# Altium PCB Midas.PcbDoc
Units mm, origin at the board's own origin, x right, y up, seen from the top; angles counter-clockwise.
Board outline 95 x 95 mm, 2 copper layers (Top Layer, Bottom Layer); 8 components, 9 nets, 58 pads, 1 vias.
Unrouted connection lines stored in the file: 2.
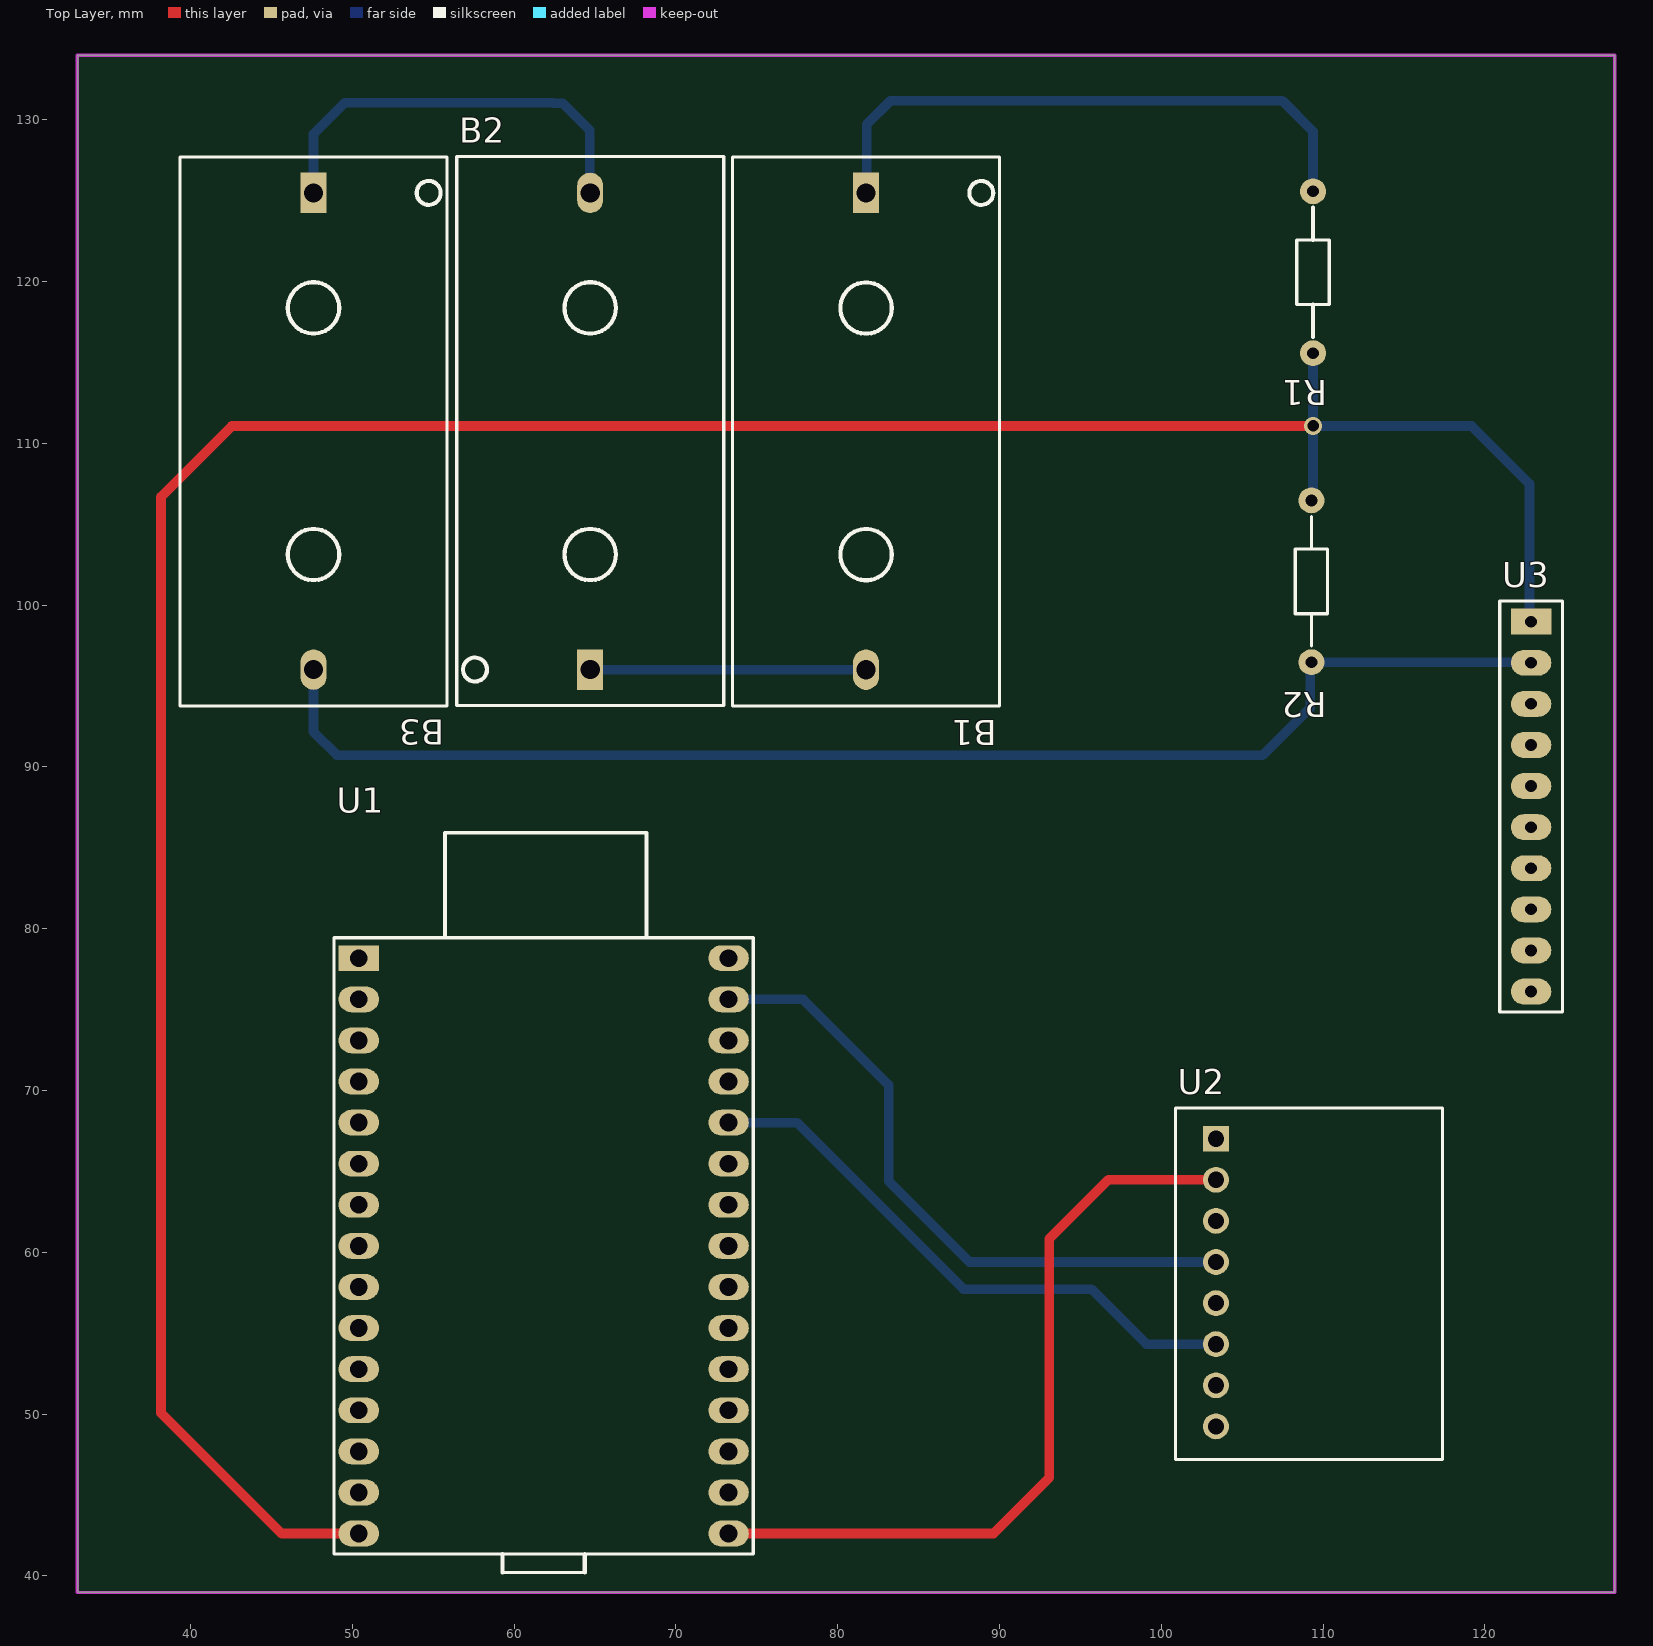
[diagram p0: Top Layer view]
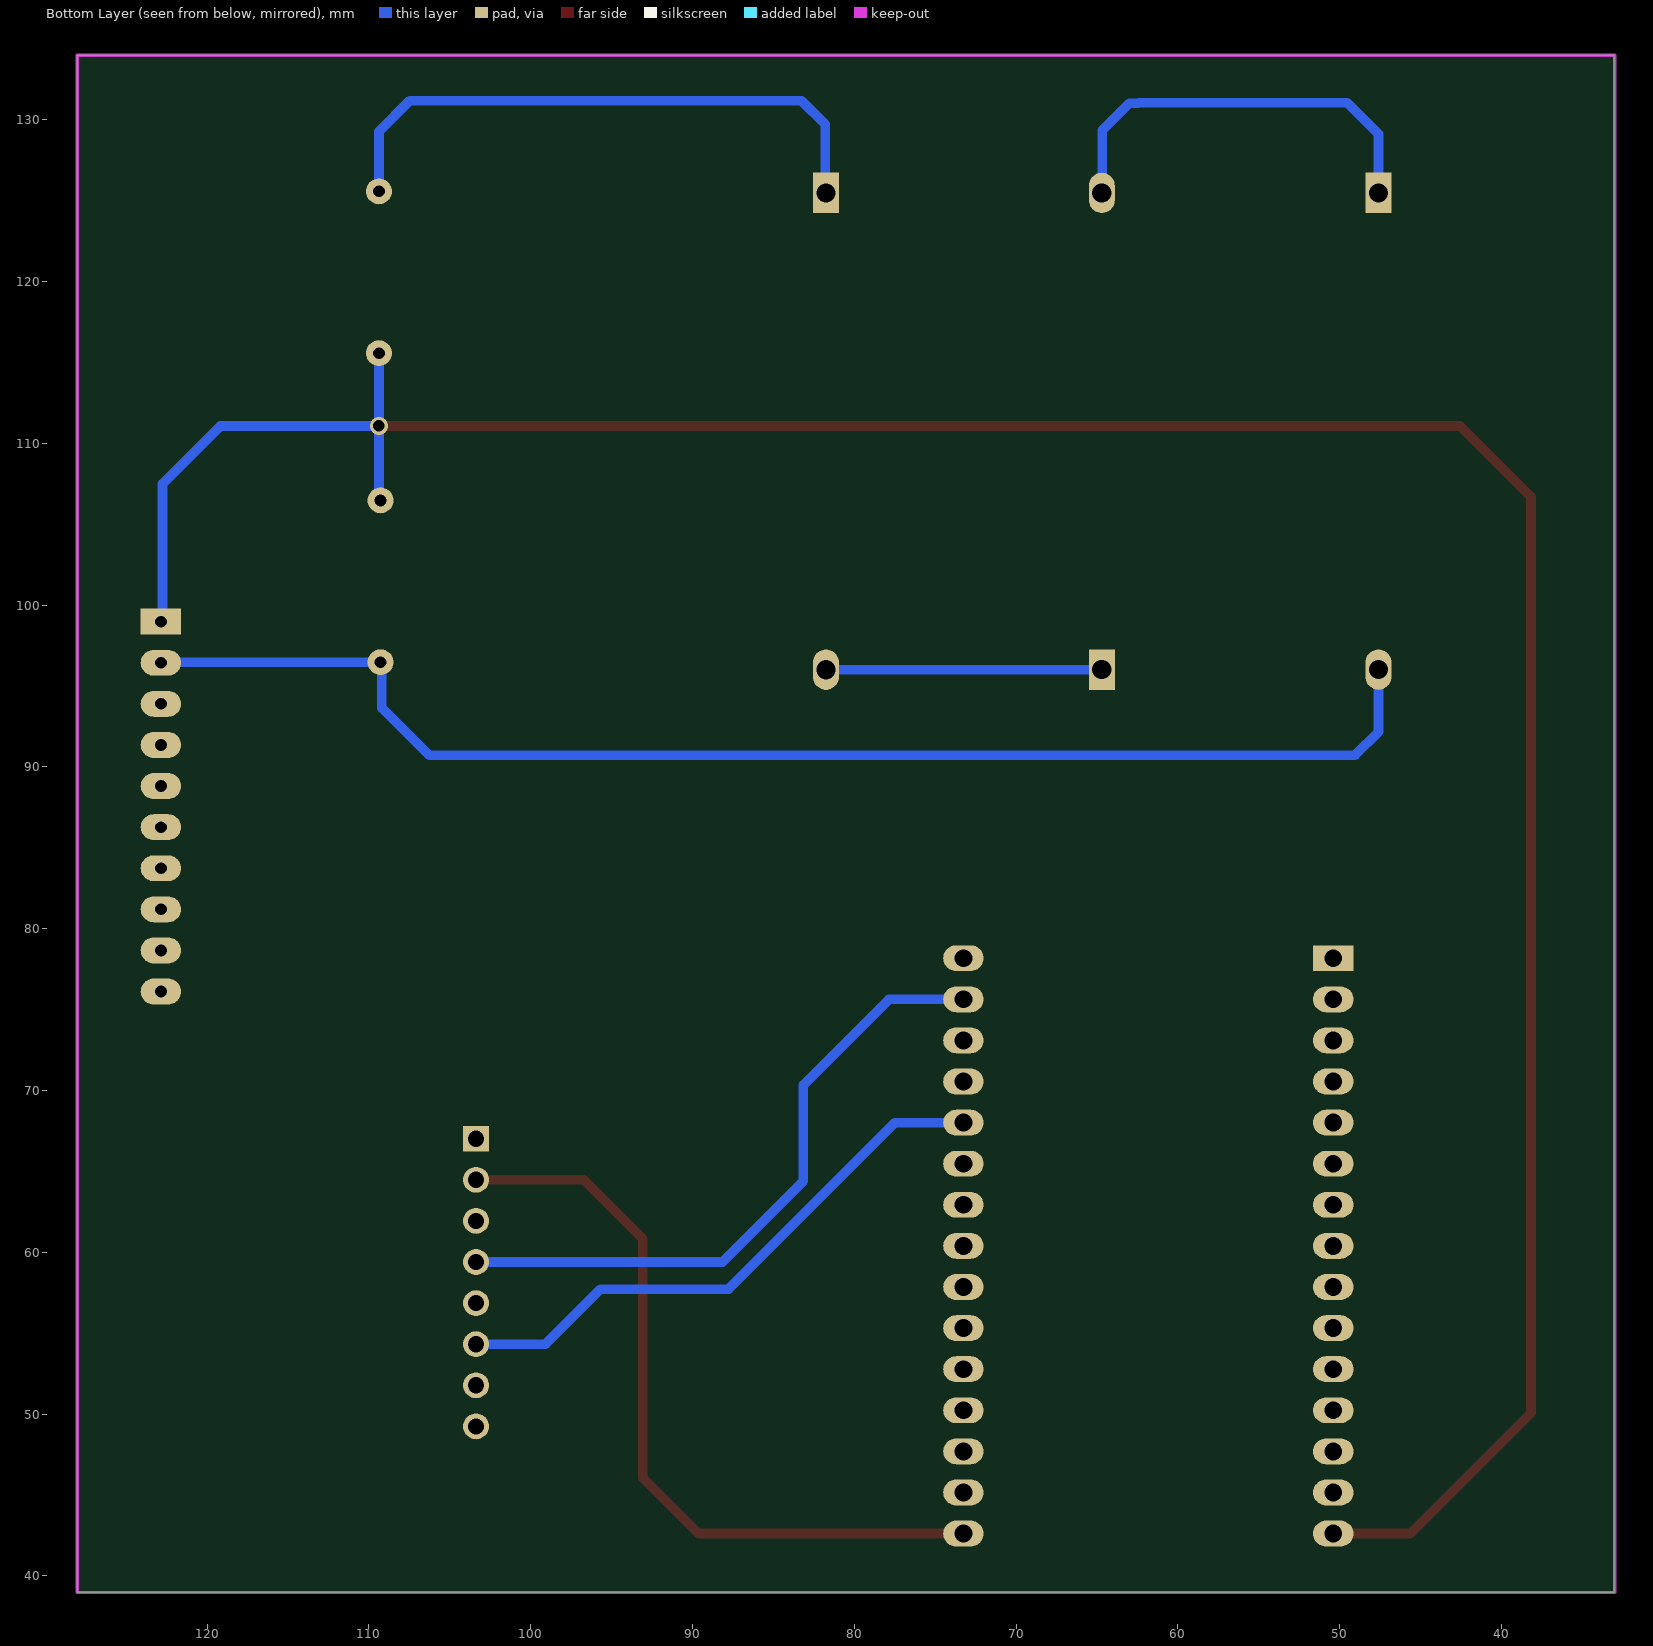
[diagram p1: Bottom Layer view, seen from below]
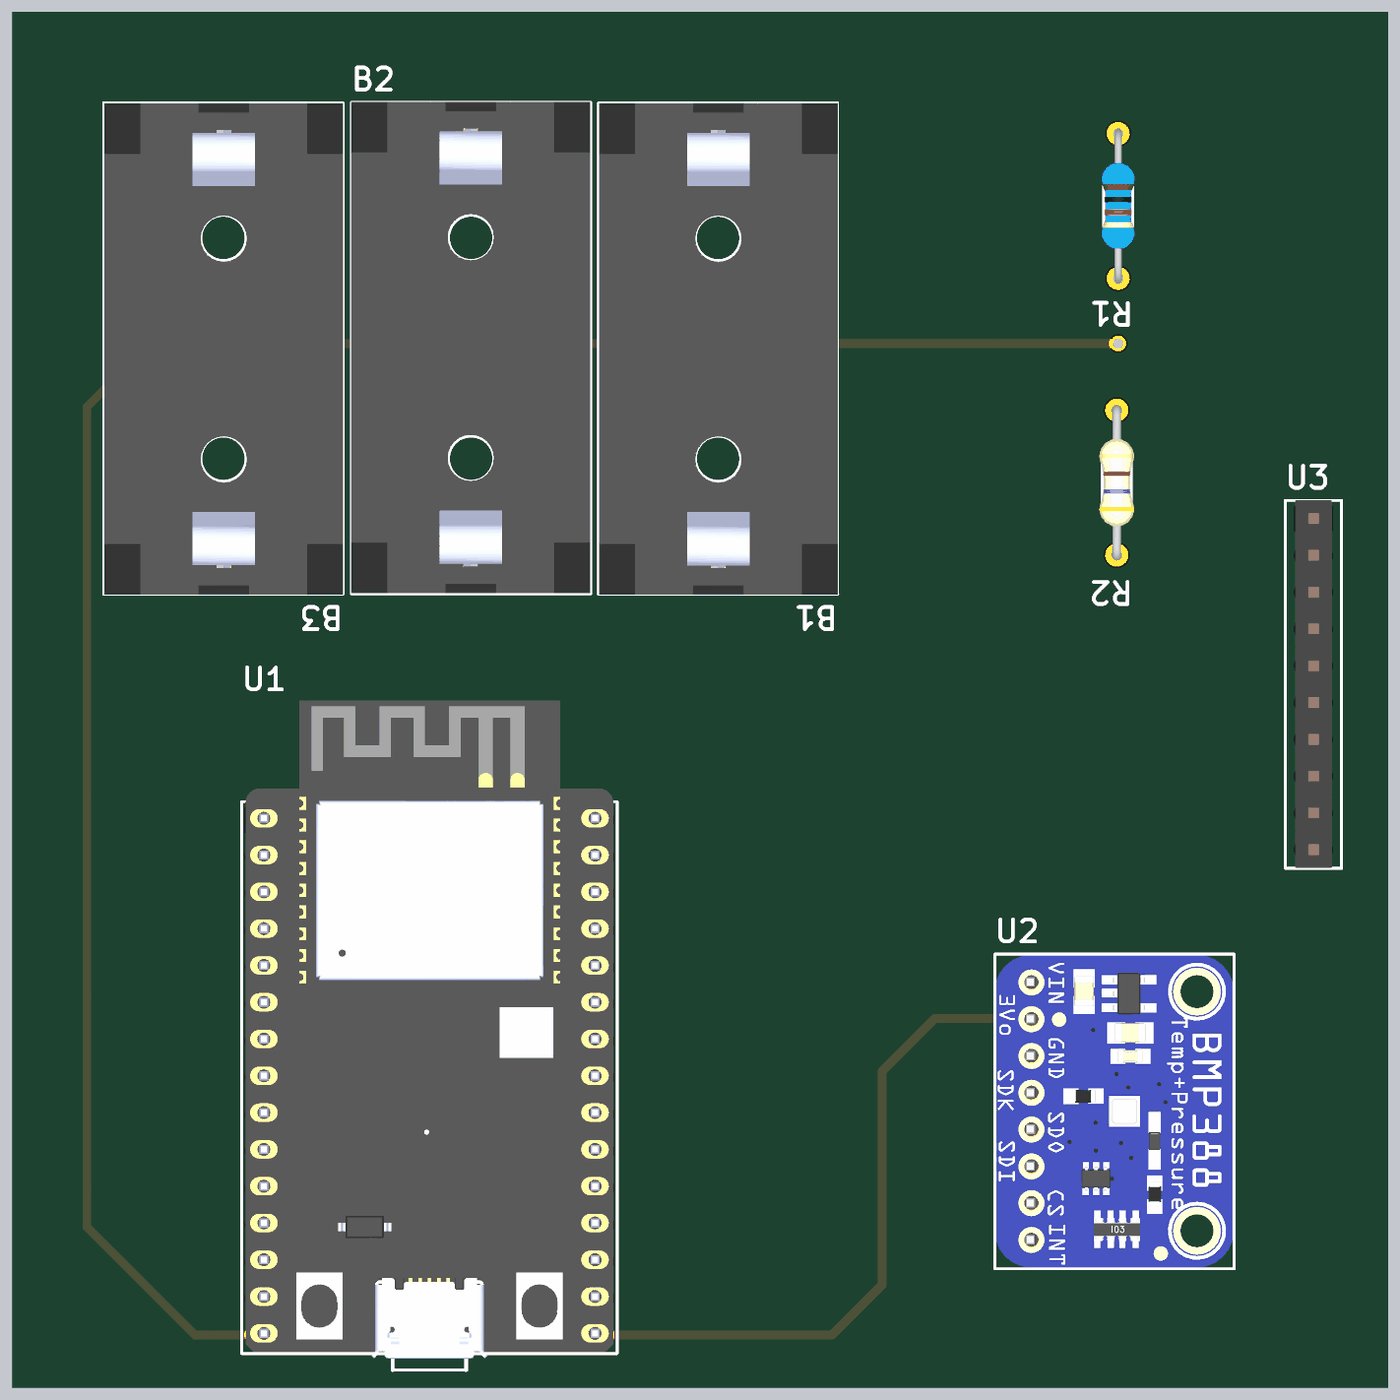
[diagram p2: 3D render of the assembled board from above, using the file's embedded part models]

## Layer stack, top to bottom
Top Solder: solder mask 0.0102, Solder Resist, Dk 3.5
Top Layer: signal copper 0.0356
Dielectric 1: dielectric 0.32, FR-4, Dk 4.8
Bottom Layer: signal copper 0.0356
Bottom Solder: solder mask 0.0102, Solder Resist, Dk 3.5

## Board outline
33.02,38.985 128.02,38.985 128.02,133.985 33.02,133.985

## Design rules (kind name [scope] priority, off if disabled: settings)
BoardOutlineClearance [All] p1: gap=0.2 ignorepadtopadclearanceinfootprint=FALSE except(0.4: Arc-SplitBarrior Arc-SplitContinuation Track-SplitBarrior Track-SplitContinuation SMDPad-SplitBarrior SMDPad-SplitContinuation THPad-SplitBarrior THPad-SplitContinuation Via-SplitBarrior Via-SplitContinuation Fill-SplitBarrior Fill-SplitContinuation Poly-SplitBarrior Poly-SplitContinuation Region-SplitBarrior Region-SplitContinuation Text-SplitBarrior Text-SplitContinuation)
Clearance "Clearance Bottom Layer" [OnLayer('Bottom Layer')] p1: gap=0.203 ignorepadtopadclearanceinfootprint=TRUE except(0.254: Arc-Text Track-Text SMDPad-Text THPad-Text Via-Text Fill-Text Poly-Text Region-Text Text-Text)
Clearance "Clearance Top Layer" [OnLayer('Top Layer')] p2: gap=0.203 ignorepadtopadclearanceinfootprint=TRUE except(0.254: Arc-Text Track-Text SMDPad-Text THPad-Text Via-Text Fill-Text Poly-Text Region-Text Text-Text)
Clearance [All] p3: gap=0.2 ignorepadtopadclearanceinfootprint=FALSE except(0.089: Arc-Arc Arc-Track Arc-SMDPad Track-Track Track-SMDPad SMDPad-SMDPad; 0.127: Arc-Via Track-Via SMDPad-Via THPad-Via Via-Via; 0.254: Arc-Text Track-Text SMDPad-Text THPad-Text Via-Text Fill-Text Poly-Text Region-Text Text-Text)
HoleSize [All] p1: absolutevalues=TRUE maxlimit=6.3 minlimit=0.2 maxpercent=80.000 minpercent=20.000
MinimumAnnularRing [All] p1: minimumring=0.076
MinimumSolderMaskSliver [All] p1: minsoldermaskwidth=0.1
PolygonConnect PolygonConnect_1 [All] p1: thpad.connectstyle=Relief thpad.reliefconductorwidth=0.508 thpad.reliefentries=4 thpad.polygonreliefangle="90 Angle" thpad.airgapwidth=0.254 smdpad.connectstyle=Relief smdpad.reliefconductorwidth=0.508 smdpad.reliefentries=4 smdpad.polygonreliefangle="90 Angle" smdpad.airgapwidth=0.254 via.connectstyle=Direct via.reliefconductorwidth=0.508 via.reliefentries=4 via.polygonreliefangle="90 Angle" via.airgapwidth=0.254
RoutingCorners [All] p1: cornerstyle=Round minsetback=2.54 maxsetback=2.54
RoutingVias [All] p1: holewidth=0.5 width=1 viastyle="Through Hole" minholewidth=0.2 minwidth=0.45 maxholewidth=1 maxwidth=2
SilkToSilkClearance [All] p1: silktosilkclearance=0.1
SilkToSolderMaskClearance [IsPad] p1: minsilkscreentomaskgap=0.1 clearancetoexposedcopper=TRUE
SolderMaskExpansion [All] p1: expansion=0.102 istentingtop=FALSE
Width [All] p1: maxlimit=2.54 minlimit=0.089 preferedwidth=0.381
25 further rules are at their usual default settings.

## Components (designator, comment, footprint, x,y, rotation, side; value= is the part's Value field where it differs from the comment)
B1 "BATT HOLDER 1/2AA" 815-0931 81.75,110.745 r270 top
B2 "BATT HOLDER 1/2AA" 815-0931 64.7,110.75 r90 top
B3 "BATT HOLDER 1/2AA" 815-0931 47.6,110.75 r270 top
R1 "RES 10K OHM" MFR-25FRF52-10K 109.375,125.575 r270 top value=10kR
R2 "RES 27K OHM" FMP100JR-52-27K 109.275,101.475 r270 top value=27kR
U1 "ESP32" ESP32 61.825,60.4 r0 top
U2 "BMP388" 3966 103.375,67.025 r0 top
U3 "Stackable Pin Bus" STACKABLE_PIN_BUS 122.85,87.55 r0 top

## Footprints (in the part's own frame and the unit in brackets; to place one, negate y for a bottom-side part, rotate by r counter-clockwise, add the part's x,y. Pads: shape width x height; smd on the part's side, far side on the other; paste and mask are expansions set on the pad)
815-0931 [mm]
  rect 2.5x1.6 hole 1.19: 1(-14.73,0)
  oval 2.5x1.6 hole 1.19: 2(14.73,0)
  silkscreen extent -16.96,-8.25 16.98,8.26, body extent -16.92,-8.23 17.02,8.28, height 14.73
3966 [mm]
  rect 1.6x1.6 hole 1: 1(0,0)
  round 1.6 hole 1: 2(0,-2.54) 3(0,-5.08) 4(0,-7.62) 5(0,-10.16) 6(0,-12.7) 7(0,-15.24) 8(0,-17.78)
  silkscreen extent -2.5,-19.82 14,1.9, body extent -2.53,-19.74 13.98,1.85, height 1.47
ESP32 [mm]
  rect 2.5x1.6 hole 1.1: 1(-11.43,17.78)
  oval 2.5x1.6 hole 1.1: 2(-11.43,15.24) 3(-11.43,12.7) 4(-11.43,10.16) 5(-11.43,7.62) 6(-11.43,5.08) 7(-11.43,2.54) 8(-11.43,0) 9(-11.43,-2.54) 10(-11.43,-5.08) 11(-11.43,-7.62) 12(-11.43,-10.16) 13(-11.43,-12.7) 14(-11.43,-15.24) 15(-11.43,-17.78) 16(11.43,-17.78) 17(11.43,-15.24) 18(11.43,-12.7) 19(11.43,-10.16) 20(11.43,-7.62) 21(11.43,-5.08) 22(11.43,-2.54) 23(11.43,0) 24(11.43,2.54) 25(11.43,5.08) 26(11.43,7.62) 27(11.43,10.16) 28(11.43,12.7) 29(11.43,15.24) 30(11.43,17.78)
  silkscreen extent -12.95,-20.19 12.95,25.53, body extent -12.7,-19.39 12.7,26.03, height 7.49
FMP100JR-52-27K [mm]
  round 1.6 hole 0.725: 1(-5,0) 2(5,0)
  silkscreen extent -4,-1 4,1, body extent -6.08,-1.2 6.08,1.2, height 2.45
MFR-25FRF52-10K [mm]
  round 1.6 hole 0.725: 1(0,0) 2(10,0)
  silkscreen extent 1,-1 9,1, body extent -0.33,-1.15 10.33,1.14, height 2.73
STACKABLE_PIN_BUS [mm]
  rect 2.5x1.6 hole 0.725: 1(0,11.43)
  oval 2.5x1.6 hole 0.725: 2(0,8.89) 3(0,6.35) 4(0,3.81) 5(0,1.27) 6(0,-1.27) 7(0,-3.81) 8(0,-6.35) 9(0,-8.89) 10(0,-11.43)
  silkscreen extent -1.94,-12.7 1.95,12.7, body extent -1.25,-12.69 1.29,12.71, height 8

## Part data
B1 B2 B3: library part 815-0931, "HOLDER 1/2AA BATTERY W/O COVER", Manufacturer="Memory Protection Devices", Supplier Part Number=815-0931-ND, Category=Uncategorized, ComponentLink1Description=https://datasheet.ciiva.com/4/815-0931-datasheet-4327.pdf?src-supplier=Digikey, ComponentLink1URL=https://datasheet.ciiva.com/4/815-0931-datasheet-4327.pdf?src-supplier=Digikey, Manufacturer Part Number=815-0931, Pricing="1=1,32, 10=1,116, 50=0,9816, 100=0,9251, 250=0,85124, 500=0,79912, 1000=0,747, 2500=0,67751, 5000=0,62539 (USD)", RoHS=Yes, Stock=10403, Supplier=Digikey
R1: library part MFR-25FRF52-10K, "Fixed Resistor, Metal Film, 0.25W, 10000ohm, 250V, 1% +/-Tol, 100ppm/Cel, Through Hole Mount", Manufacturer=Yageo, Max Operating Temperature=155°C, Min Operating Temperature=-55°C, Package Diameter=2.4mm, Package Length=6.3mm, Package Shape=Tubular, Package Style=AxialMeter, Power=250mW, Rated Temperature=70°C, Resistor Type="FIXED RESISTOR", Supplier Part Number=13-MFR-25FRF52-10KCT-ND, Temperature Coefficient=100ppm/°C, Tolerance=1%, Working Voltage=250V, Category="Through-Hole Resistors", ComponentLink1Description=https://datasheet.ciiva.com:443/pdfs/VipMasterIC/IC/YAGO/YAGO-S-A0009358480/YAGO-S-A0009358480-1.pdf?src-supplier=IHS+Markit, ComponentLink1URL=https://datasheet.ciiva.com:443/pdfs/VipMasterIC/IC/YAGO/YAGO-S-A0009358480/YAGO-S-A0009358480-1.pdf?src-supplier=IHS+Markit, ComponentLink2Description=https://datasheet.ciiva.com/25645/yageolr-mfr-2013-25645549.pdf?src-supplier=Digikey, ComponentLink2URL=https://datasheet.ciiva.com/25645/yageolr-mfr-2013-25645549.pdf?src-supplier=Digikey, Construction=Cylindrical, JESD-609 Code=e3, Lead Diameter=0.55mm, Lead Length=28mm, Manufacturer Part Number=MFR-25FRF52-10K, Mounting Technology="Through Hole", Packaging="Tape and Reel", Pins=2, Pricing="1=0,1, 10=0,077, 25=0,056, 50=0,0436, 100=0,0296, 250=0,02428, 500=0,01928, 1000=0,01369 (USD)", Reach SVHC Compliant=Yes, RoHS=Yes, RoHS Compliant=Yes, Stock=169602, Supplier=Digikey, Technology="METAL FILM", Terminal Finish=Tin, Termination=Wire
R2: library part FMP100JR-52-27K, "Fixed Resistor, Metal Film, 1W, 27000ohm, 350V, 5% +/-Tol", Manufacturer=Yageo, Manufacturer Series=FMP, Max Operating Temperature=155°C, Min Operating Temperature=-55°C, Package Diameter=2.4mm, Package Length=6.3mm, Package Shape=Cylindrical, Package Style=AxialMeter, Power=1W, Resistor Type="FIXED RESISTOR", Supplier Part Number=27KWCT-ND, Tolerance=5%, Working Voltage=350V, Category="Through-Hole Resistors", ComponentLink1Description=https://datasheet.ciiva.com/2710/yageolr-fmp-2013-2710623.pdf?src-supplier=Digikey, ComponentLink1URL=https://datasheet.ciiva.com/2710/yageolr-fmp-2013-2710623.pdf?src-supplier=Digikey, ComponentLink2Description=https://datasheet.ciiva.com/2710/yageolr-fmp-2013-2710624.pdf?src-supplier=Digikey, ComponentLink2URL=https://datasheet.ciiva.com/2710/yageolr-fmp-2013-2710624.pdf?src-supplier=Digikey, Construction=Cylindrical, JESD-609 Code=e3, Lead Diameter=0.55mm, Lead Length=28mm, Manufacturer Part Number=FMP100JR-52-27K, Packaging="Tape and Reel", Pins=2, Pricing="1=0,2, 10=0,164, 25=0,126, 50=0,0912, 100=0,0642, 250=0,05192, 500=0,04092, 1000=0,02832 (USD)", Reach SVHC Compliant=Yes, RoHS=Yes, RoHS Compliant=Yes, Series=FMP, Stock=32661, Supplier=Digikey, Technology="METAL FILM", Terminal Finish=Tin
U1: library part ESP32-C3-DEVKITC-02, Manufacturer="Espressif Systems", Supplier Part Number=1965-ESP32-C3-DEVKITC-02-ND, Category="RF Semiconductors and Devices", Manufacturer Part Number=ESP32-C3-DEVKITC-02, Pricing="1=8 (USD)", RoHS=No, Stock=1074, Supplier=Digikey
U2: library part 3966, "Test Lead, Blk, Red, 139.7MM, 500V 3V ~ 5V / Adafruit Industries LLC / BMP388 - Pressure Sensor Evaluation Board / BMP388", Manufacturer="Adafruit Industries", Supplier Part Number=1528-2733-ND, Category="Pressure Sensors", Manufacturer Part Number=3966, Pricing="1=9,95 (USD)", RoHS=No, Stock=21, Supplier=Digikey
U3: library part "Barramento Empilhável", "10 pinos, Passo 2.54mm, Dimensões da barra 26x2x8mm"

## Via types
v1: diameter 1.1, hole 0.711, Top Layer to Bottom Layer, 1 vias

## Nets (pads, with @x,y where several pads share a name; then routed paths per layer and width w, separated by ;. In a path a pad name is that pad's centre, name@x,y a point inside that pad or via, vN(x,y) a via of type N, cw(c..) or ccw(c..) an arc to the next point about the centre after c; other vN are vias at no path point)
3V3: U1.16 U2.2 | length 47.8
  Top Layer w0.6: U1.16 89.62,42.62 93.075,46.075 93.075,60.85 96.71,64.485 U2.2
GND: U1.14 U1.17 U2.3
GNDBAT: B3.2 R2.2 U3.2 | length 83.6
  Bottom Layer w0.6: B3.2 47.6,92.175 49.05,90.725 106.275,90.725 109.2,93.65 R2.2@109.2,96.575 ; R2.2 U3.2@122.735,96.475
NEG1/POS2: B1.2 B2.1 | length 16.4
  Bottom Layer w0.6: B2.1@65.34,96.015 B1.2@81.775,96.015
NEG2/POS3: B2.2 B3.1 | length 26.1
  Bottom Layer w0.6: B3.1 47.6,129.125 49.525,131.05 62.425,131.05 62.45,131.025 63,131.025 64.675,129.35 B2.2@64.675,125.505
SCL/SCK: U1.29 U2.4 | length 40.3
  Bottom Layer w0.6: U1.29 77.86,75.64 83.15,70.35 83.15,64.4 88.145,59.405 U2.4
SDA/SDI: U1.26 U2.6 | length 35.8
  Bottom Layer w0.6: U1.26 77.48,68.02 87.775,57.725 95.675,57.725 99.075,54.325 U2.6
VBAT: B1.1 R1.1 | length 37.1
  Bottom Layer w0.6: B1.1@81.8,125.285 81.8,129.725 83.25,131.175 107.475,131.175 109.375,129.275 R1.1
VCC: R1.2 R2.1 U1.15 U3.1 | length 177.8
  Top Layer w0.6: U1.15 45.63,42.62 38.175,50.075 38.175,106.7 42.55,111.075 v1(109.375,111.075)
  Bottom Layer w0.6: R2.1@109.375,106.575 R1.2 ; v1(109.375,111.075) 119.175,111.075 122.75,107.5 U3.1@122.75,98.55
pads on no net: U1.1 U1.2 U1.3 U1.4 U1.5 U1.6 U1.7 U1.8 U1.9 U1.10 U1.11 U1.12 U1.13 U1.18 U1.19 U1.20 U1.21 U1.22 U1.23 U1.24 U1.25 U1.27 U1.28 U1.30 U2.1 U2.5 U2.7 U2.8 U3.3 U3.4 U3.5 U3.6 U3.7 U3.8 U3.9 U3.10

## Keep-outs
Keep-Out Layer:
  lines w0.2: 33,38.985 33,133.985 128.02,133.985 128.02,38.985 33,38.985

## Text inside footprints (layer, text, board x,y; h text height)
B1: Mechanical 1 "+" at 85.006,123.316 h2.54 r270; Mechanical 1 "-" at 75.409,99.916 h2.54 r270
B2: Mechanical 1 "+" at 61.444,98.179 h2.54 r90; Mechanical 1 "-" at 71.041,121.579 h2.54 r90
B3: Mechanical 1 "+" at 50.856,123.321 h2.54 r270; Mechanical 1 "-" at 41.259,99.921 h2.54 r270